# Altium PCB 1.pcbdoc
Units mil, origin at the board's own origin, x right, y up, seen from the top; angles counter-clockwise.
Board outline 44440.04 x 3139.11 mil, 2 copper layers (Top Layer, Bottom Layer); 30 components, 48 nets, 167 pads, 69 vias.
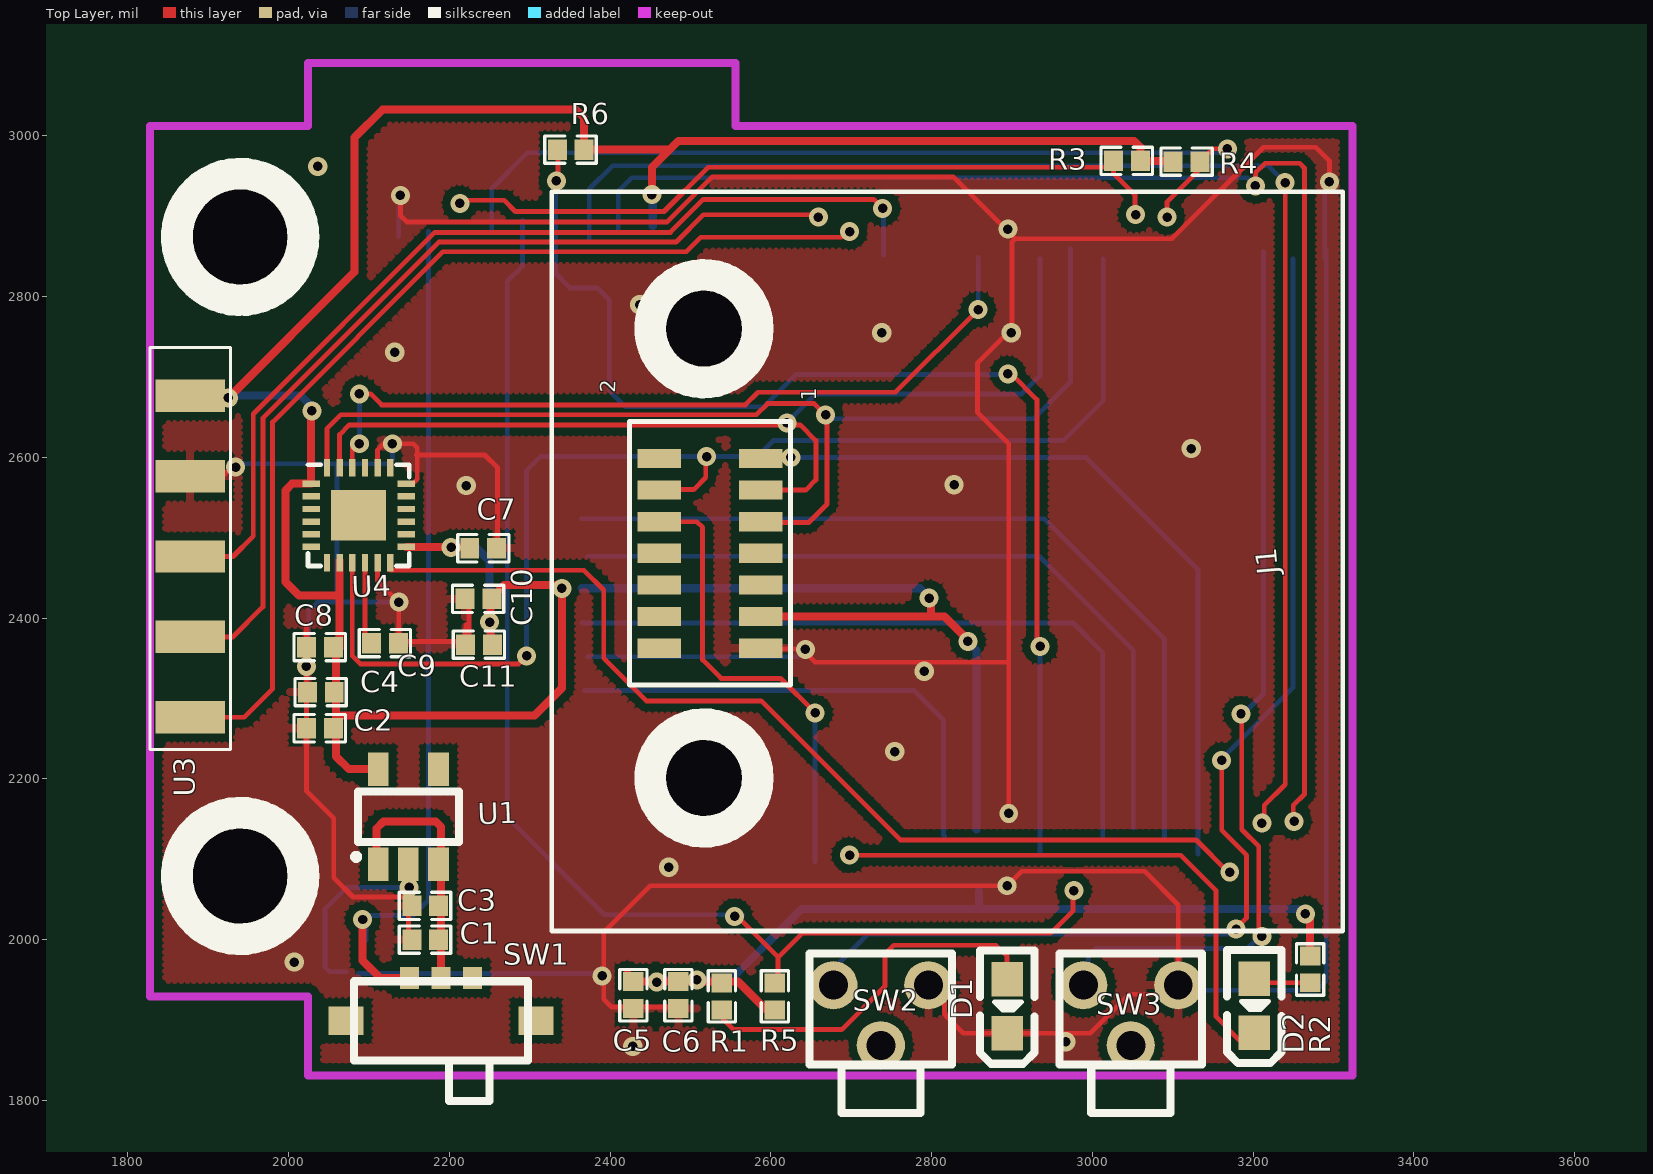
[diagram p0: Top Layer view]
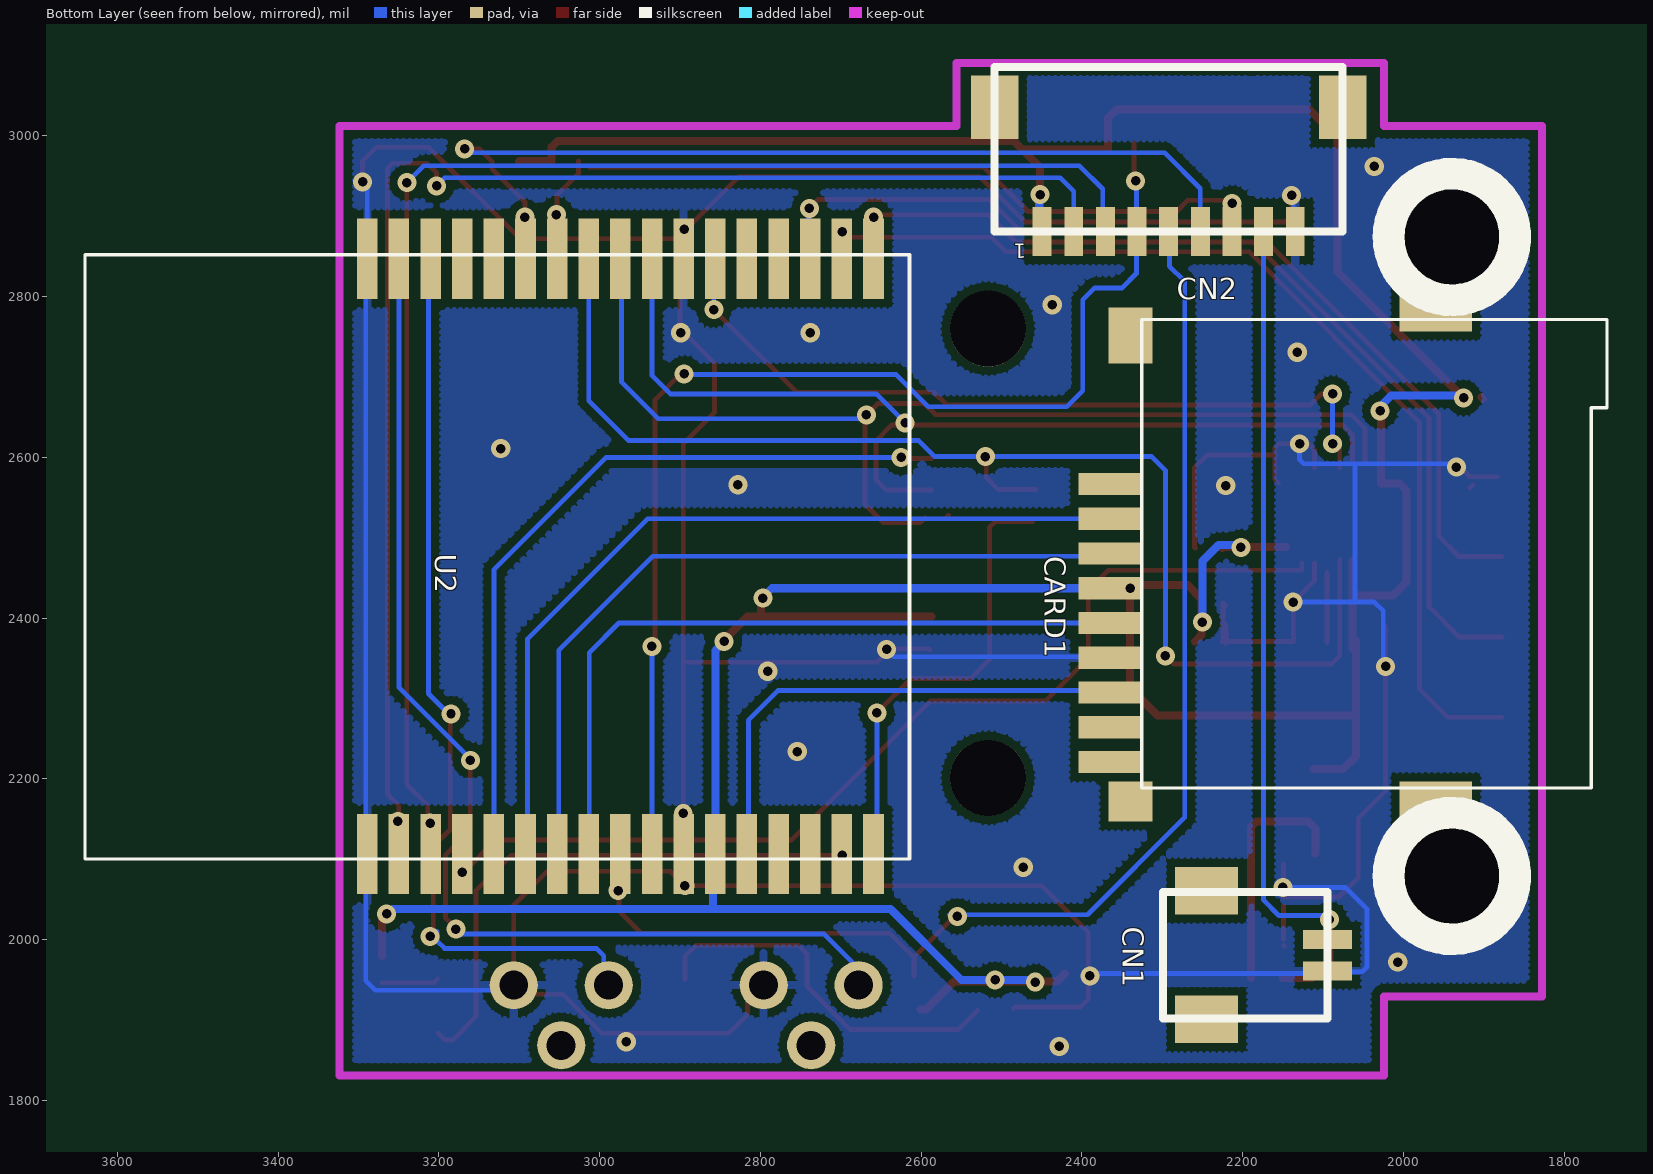
[diagram p1: Bottom Layer view, seen from below]

## Layer stack, top to bottom
Top Layer: signal copper 1.4
Dielectric: dielectric 12.6, FR-4, Dk 4.8
Bottom Layer: signal copper 1.4

## Board outline
45440.04,1000 1000,1000 1000,4139.11 45440.04,4139.11

## Design rules (kind name [scope] priority, off if disabled: settings)
Clearance Clearance_1 [(InPolygon)] p1: gap=10
Clearance [All] p2: gap=6
ComponentClearance [All] p1 off: gap=10 collisioncheckmode=3 verticalgap=10
PolygonConnect [isvia] p1: connectstyle=Direct reliefconductorwidth=10 reliefentries=4 polygonreliefangle="90 Angle"
RoutingVias [All] p1: holewidth=27.99 width=50 viastyle="Through Hole" minholewidth=11.81 minwidth=23.62 maxholewidth=27.99 maxwidth=50
SolderMaskExpansion [All] p1: expansion=4
TestPointUsage [All] p1: valid=0 allowmultiple=FALSE
Testpoint [All] p1: side=15 testpointundercomponent=TRUE minsize=40 maxsize=100 preferedsize=60 minholesize=0 maxholesize=40 preferedholesize=32 testpointgrid=1 style=1023 order=0123456789
Width Width_2 [InNet('VCC3.7')] p1: maxlimit=100 minlimit=10 preferedwidth=10 minimp=50.000000 maximp=50.000000 favimp=50.000000
Width Width_1 [InNet('VCC3.3')] p2: maxlimit=100 minlimit=10 preferedwidth=10 minimp=50.000000 maximp=50.000000 favimp=50.000000
Width [All] p3: maxlimit=10 minlimit=6 preferedwidth=10 minimp=50.000000 maximp=50.000000 favimp=50.000000
18 further rules are at their usual default settings.

## Components (designator, comment, footprint, x,y, rotation, side; value= is the part's Value field where it differs from the comment)
C1 "10uF" 0402 2170,2000 r0 top
C2 "10uF" 0402 2039,2263 r0 top
C3 "100nF" 0402 2170,2042 r0 top
C4 "100nF" 0402 2040,2308 r0 top
C5 "10uF" 0402 2429,1931 r90 top
C6 "100nF" 0402 2485,1931 r90 top
C7 "10nF" 0402 2242,2487 r180 top
C8 "100nF" 0402 2039,2364 r0 top
C9 "100nF" 0402 2120,2369 r0 top
C10 "10uF" 0402 2236,2424 r0 top
C11 "1uF" 0402 2237,2367 r0 top
CARD1 "HYC77-TF09-200" TF-015 2162.05,2476.72 r270 bottom locked
CN1 "A1002WV-S-2P" A1002WR-S-2P_LEO 2169.92,1980.66 r90 bottom
CN2 "A1002WR-S-9P" A1002WR-S-9P_LEO 2291.97,2957.04 r180 bottom locked
D1 "RED" LED-0603 2894,1917 r90 top
D2 "GREEN" LED-0603 3201.42,1917.67 r90 top
J1 "CLM-107-02-XX-D" *CLM-107-02-XX-D_2 2524.25,2480.66 r270 top locked
R1 "1K" 0402 2539,1929 r270 top
R2 "200" 0402 3271,1963 r90 top
R3 "10K" 0402 3043,2969 r0 top
R4 "10K" 0402 3117,2968 r180 top
R5 "10K" 0402 2605,1929 r270 top
R6 "10K" 0402 2351,2983 r0 top
SW1 "SSAJ120100" SW-SMD-5.5X2.5 2189.61,1925.54 r0 top
SW2 "KAN4562-0501C" KAN4562-0501C 2736.85,1905.86 r0 top
SW3 "KAN4562-0501C" KAN4562-0501C 3047.87,1905.86 r0 top
U1 "SPX3819M5-L-3-3/TR" SOT-23-5 2149,2153 r90 top
U2 "DWM1001" DWM1001 3126.61,2476.72 r270 bottom locked
U3 "GPS_Header" GPS_HEADER_SMT_NEW 1827.4,1960.97 r90 top locked
U4 "MPU-9250" QFN-24-1EP_3X3MM_PITCH0.4MM 2087,2528 r0 top

## Footprints (in the part's own frame and the unit in brackets; to place one, negate y for a bottom-side part, rotate by r counter-clockwise, add the part's x,y. Pads: shape width x height; smd on the part's side, far side on the other; paste and mask are expansions set on the pad)
0402 [mm]
  rect 0.6x0.65 smd: 1(-0.424,0) 2(0.424,0)
  silkscreen extent -0.82,-0.43 0.81,0.43
*CLM-107-02-XX-D_2 [mil]
  rect 24x54 smd: 1(-118.11,63) 2(-118.11,-63) 3(-78.74,63) 4(-78.74,-63) 5(-39.37,63) 6(-39.37,-63) 7(0,63) 8(0,-63) 9(39.37,63) 10(39.37,-63) 11(78.74,63) 12(78.74,-63) 13(118.11,63) 14(118.11,-63)
  round 94.49 hole 94.49 unplated: ""(-279.53,-7.48) ""(279.53,-7.48)
  silkscreen extent -450,-197 470,787
A1002WR-S-2P_LEO [mm]
  rect 0.6x1.55 smd: 1(-0.501,-1.924) 2(0.499,-1.924)
  rect 1.5x2 smd: 3(-2.032,1.905) 4(2.032,1.905)
  silkscreen extent -2,-1.92 2,3.27
A1002WR-S-9P_LEO [mm]
  rect 0.6x1.55 smd: 1(-4,-1.923) 2(-3,-1.923) 3(-1.997,-1.926) 4(-1,-1.923) 5(0,-1.923) 6(1,-1.923) 7(1.999,-1.923) 8(3,-1.923) 9(4,-1.923)
  rect 1.5x2 smd: 10(-5.499,1.999) 11(5.5,1.999)
  silkscreen extent -5.5,-1.92 5.5,3.28
DWM1001 [mm]
  rect 2.54x0.65 smd: 1(9.404,-4.129) 2(9.404,-3.129) 3(9.404,-2.129) 4(9.404,-1.129) 5(9.404,-0.129) 6(9.404,0.871) 7(9.404,1.871) 8(9.404,2.871) 9(9.404,3.871) 10(9.404,4.871) 11(9.404,5.871) 12(9.404,6.871) 13(9.404,7.871) 14(9.404,8.871) 15(9.404,9.871) 16(9.404,10.871) 17(9.404,11.871) 18(-9.406,11.871) 19(-9.406,10.871) 20(-9.406,9.871) 21(-9.406,8.871) 22(-9.406,7.871) 23(-9.406,6.871) 24(-9.406,5.871) 25(-9.406,4.871) 26(-9.406,3.871) 27(-9.406,2.871) 28(-9.406,1.871) 29(-9.406,0.871) 30(-9.406,-0.129) 31(-9.406,-1.129) 32(-9.406,-2.129) 33(-9.406,-3.129) 34(-9.406,-4.129)
  silkscreen extent -9.54,-13.05 9.56,13.02
GPS_HEADER_SMT_NEW [mm]
  rect 1.02x2.2 smd: 1(18.18,-1.27) 2(15.64,-1.27) 3(13.1,-1.27) 4(10.56,-1.27) 5(8.02,-1.27)
  round 3 hole 3 unplated: ""(3,-2.85) ""(23.2,-2.85)
  silkscreen extent 1,-4.85 25.2,0
KAN4562-0501C [mil]
  round 60 hole 36: 0(0,-37.39) 1(-59.05,37.4) 2(59.06,37.4)
  silkscreen extent -89,-122 89,77
LED-0603 [mil]
  rect 43x39 smd: 1(33.5,0) 2(-33.5,0)
  silkscreen extent -72,-34 70,34
QFN-24-1EP_3X3MM_PITCH0.4MM [mm]
  rect 0.55x0.2 smd: 1(-1.5,1) 2(-1.5,0.6) 3(-1.5,0.2) 4(-1.5,-0.2) 5(-1.5,-0.6) 6(-1.5,-1) 13(1.5,-1) 14(1.5,-0.6) 15(1.5,-0.2) 16(1.5,0.2) 17(1.5,0.6) 18(1.5,1)
  rect 0.2x0.55 smd: 7(-1,-1.5) 8(-0.6,-1.5) 9(-0.2,-1.5) 10(0.2,-1.5) 11(0.6,-1.5) 12(1,-1.5) 19(1,1.5) 20(0.6,1.5) 21(0.2,1.5) 22(-0.2,1.5) 23(-0.6,1.5) 24(-1,1.5)
  rect 0.875x0.8 smd: 25(-0.435,-0.4) 25(-0.435,0.4) 25(0.435,-0.4) 25(0.435,0.4)
  silkscreen extent -1.6,-1.6 1.6,1.6
SOT-23-5 [mm]
  rect 1.06x0.65 smd: 1(-1.5,0.95) 2(-1.5,0) 3(-1.5,-0.95) 4(1.5,-0.95) 5(1.5,0.95)
  silkscreen extent -1.33,-1.6 0.8,1.71
SW-SMD-5.5X2.5 [mm]
  rect 0.6x0.7 smd: 1(-1,0.675) 2(1,0.675) C(0,0.675)
  rect 1.1x0.9 smd: 4(-3,-0.675) 5(3,-0.675)
  silkscreen extent -2.75,-3.22 2.75,0.57
TF-015 [mm]
  rect 0.7x2 smd: 1(-2.292,-5.145) 2(-1.192,-5.143) 3(-0.095,-5.145) 4(1.004,-5.145) 5(2.103,-5.145) 6(3.201,-5.145) 7(4.297,-5.145) 8(5.396,-5.145) 9(6.499,-5.145)
  rect 1.27x1.397 smd: 10(7.747,-4.507)
  rect 1.27x2.286 smd: 11(7.747,5.145) 12(-7.747,5.145)
  rect 1.778x1.397 smd: 13(-6.985,-4.507)
  silkscreen extent -7.49,-4.15 7.32,10.56

## Via types
v1: diameter 23.62, hole 11.81, Top Layer to Bottom Layer, tented both sides, 55 vias
v2: diameter 24, hole 11.81, Top Layer to Bottom Layer, tented both sides, 14 vias

## Nets (pads, with @x,y where several pads share a name; then routed paths per layer and width w, separated by ;. In a path a pad name is that pad's centre, name@x,y a point inside that pad or via, vN(x,y) a via of type N, cw(c..) or ccw(c..) an arc to the next point about the centre after c; other vN are vias at no path point)
BUTTON_RST: SW2.1 U2.33 | length 1431.7
  Top Layer w6: v1@3161,2225 3161,2136 3192,2105 3192,2027 3186.65,2021.65 v1@3175.65,2021.65
  Bottom Layer w6: SW2.1 2677.8,1963.8 2721,2007 3173,2007 v1(3179,2013) ; v1@3160,2224 3249.79,2313.79 U2.33
  other v1: 3161,2223
BUTTON_SDCARD: SW3.1 U2.32 | length 1142
  Top Layer w6: v1(3185,2281) 3186,2280 3186,2137 3207,2116 v1@3207,2004
  Bottom Layer w6: SW3.1@2995,1938 2995,1980 3004,1989 3193,1989 3202,1998 v1@3202,2010 ; v1@3186.5,2279.5 3213,2306 U2.32@3213,2856
  other v1: 3211,2004
CHARGE_VC: CN1.2 CN2.8 SW1.1 | length 1068.5
  Top Layer w10: v1@2093,2025 2092,2024 2092,1974 2113.89,1952.11 SW1.1
  Bottom Layer w6: v1(2092,2025) 2097,2030 2155,2030 2173.87,2048.87 CN2.8
  Bottom Layer w10: v1(2092,2025) 2094.16,2022.84 CN1.2
D2_1: D2.1 R2.1 | length 71.6
  Top Layer w6: D2.1 3206.29,1946.3 R2.1
FOOT_2: CN2.4 R6.1 U2.10 | length 1493.8
  Top Layer w6: v1(2333,2944) 2335,2946 R6.1@2335,2991 ; v1(2895,2704) 2899,2704 2931,2672 2931,2369 v1(2935,2365)
  Bottom Layer w6: v1@2332,2943 2332,2829 2350,2811 2384,2811 2399,2796 2399,2683 2419,2663 2591,2663 2631,2703 v1@2895,2703 ; U2.10 v1@2934.83,2366
FOOT_5: CN2.5 R5.1 U2.9 | length 1610.1
  Top Layer w6: v1@2555,2032 2609,1978 ; R5.1@2609,1954.7 2609,1978 ; v1(2977,2061) 2976,2060 2976,2036 2948,2008 2639,2008 2609,1978
  Bottom Layer w6: CN2.5@2291,2895 2291,2838 2272,2819 2272,2152 2393,2031 v1@2565,2031
  other v1: 2555,2029
FOOT_6: CN2.6 R4.1 U2.29 | length 1108.3
  Top Layer w6: v1@3092,2898 v1(3093,2899) 3093,2918 3133.7,2958.7 R4.1 3149.7,2984 v1(3168,2984)
  Bottom Layer w6: CN2.6 2252.59,2934.59 2297,2979 v1@3161,2979
FOOT_7: CN2.7 R3.1 U2.28 | length 908.1
  Top Layer w6: v1@2212,2920 2268,2920 2282,2906 2467,2906 2522,2961 3013,2961 ; R3.1 3026.3,2953.7 3053,2927 3053,2903 v1@3052,2902
  other v1: 3054,2902 2213,2916
GND: C1.1 C2.1 C3.1 C4.1 C5.1 C6.1 C7.1 C8.1 C9.2 C10.1 C11.1 CARD1.6 CN1.1 CN2.9 D1.2 J1.13 SW2.2 SW3.2 U1.2 U2.1 U2.11 U2.24 U2.34 U3.2 U4.11 U4.18 U4.20 | length 7612.2
  Top Layer w6: U3.2@1883,2576 1917,2576 v1@1932,2591 ; U3.2@1913,2566 U3.2@1917,2562 ; 2022.3,2390 2022.3,2184.7 2056,2151 2056,2077 2080,2053 2148,2053 2149,2052 U1.2 ; U4.11 2110.62,2446.38 v1(2137,2420) 2137,2391.7 2136.7,2371 2219,2371 2221,2392 C11.1@2221,2368.11 ; U4.20 2110.62,2609.62 2118,2617 2155,2617 2160,2612 2160,2573 U4.18@2155,2568 ; v1(2139,2926) 2139,2901 2147,2893 2471,2893 2527,2949 2827,2949 2904,2872 ; C1.1@2148,1992 C1.1@2149,1993 ; C1.1@2149,2000 C3.1@2149,2042 ; 2159,2603 2244,2603 2260,2587 2260,2488.3 C7.1 ; C10.1@2221,2415.89 2224.32,2419.21 2224.32,2372.28 C11.1@2225.6,2371 ; C6.1 2483.3,1916 2402,1916 2392,1926 2392,2009 2450,2067 v1(2894,2067) 2912,2085 3065,2085 3106.93,2043.07 SW3.2 ; J1.13@2589,2361 2590,2362 2638,2362 2655,2345 2895,2345 ; SW2.2@2816,1938 2816,1907 2839.5,1883.5 2997.5,1883.5 3046,1932 3109,1932 SW3.2@3113,1928 ; v1(2896,2157) 2896,2617 2857,2656 2857,2717 2900,2760 2900,2868 2904,2872 ; v1@3295,2937 3295,2969 3278,2986 3213,2986 3099,2872 2904,2872
  Bottom Layer w6: v1@1932,2589 1935,2592 2124,2592 2129,2597 v1(2129,2617) ; v1@2025,2344 2025,2409 2036,2420 v1(2137,2420) ; 2059,2420 2060,2421 2060,2592 ; CN1.1@2072,1960 2051,1960 2045,1966 2045,2038 2072,2065 v1(2150,2065) ; CN1.1@2086,1958 2388,1958 v1@2391,1955 ; CN2.9@2137,2875 2137,2924 v1(2139,2926) ; CARD1.6@2372,2352 2634,2352 v1(2643,2361) ; SW3.2 3113.19,1937 3279,1937 3291,1949 U2.34@3291,2858 ; U2.34 3289.16,2940.16 v1@3291,2942
  other v1: 2390,1955 2022,2340 1934,2588 2895,2884 3295,2943
  other v2: 2428,1867 2967,1873 2007,1972 2473,2090 2754,2234 2791,2334 2221,2565 2828,2566 3123,2611 2132,2731 2738,2755 2899,2755 2437,2790 2036,2962
GPS_1PPS: U2.19 U3.5 | length 1262.4
  Top Layer w6: U3.5 1944.72,2276.72 1980,2312 1980,2644 2191.96,2855.96 2494.96,2855.96 2513,2874 2688,2874 v1@2695,2881
  other v1: 2698,2881
GPS_UART_RX: U2.18 U3.4 | length 1134.8
  Top Layer w6: U3.4 1930.72,2376.72 1968,2414 1968,2649 2186.98,2867.98 2481.98,2867.98 2516,2902 v1@2657,2902
  other v1: 2659,2899
GPS_UART_TX: U2.20 U3.3 | length 1197.6
  Top Layer w6: U3.3 1930.72,2476.72 1956,2502 1956,2654 2182,2880 2475,2880 2516,2921 2728,2921 v1(2739,2910)
  Bottom Layer w6: v1(2739,2910) 2740,2909 U2.20@2740,2852
INT_IMUA: U2.4 U4.12 | length 1258.7
  Top Layer w6: U4.12 2126.38,2459.62 2367.38,2459.62 2392,2435 2392,2350 2445,2297 2588,2297 2761,2124 3129,2124 v1@3170,2083
  other v1: 3171,2084
INT_IMUB: J1.1 U2.5 | length 956.6
  Top Layer w6: J1.1 2623.77,2598.77 v1(2625,2600)
  Bottom Layer w6: v1(2625,2600) 2992,2600 3131.68,2460.32 U2.5
LED_R: D2.2 U2.16 | length 694.5
  Top Layer w6: v1(2698,2105) 3110,2105 3154,2061 3154,1904 3183,1875 3192.25,1875 D2.2
R1_2: D1.1 R1.2 | length 475
  Top Layer w6: R1.2@2530,1911.7 2553.7,1888 2688,1888 2742,1942 2742,1982 2753,1993 2880,1993 2894,1979 D1.1
S$21: 
S$23: 
S$33: 
S$35: 
S$39: 
S$41: 
S$52: 
S$54: 
S$1289: 
S$1291: 
S$1294: 
S$1296: 
S$1299: 
S$1301: 
S$1303: 
S$1306: 
S$1308: 
S$1310: 
SDCARD_CLK: CARD1.5 U2.8 | length 893.7
  Bottom Layer w6: CARD1.5 2976.06,2393.94 3013,2357 U2.8@3013,2127
SDCARD_MISO: CARD1.7 U2.13 | length 606.7
  Bottom Layer w6: CARD1.7@2368,2310 2778,2310 2815,2273 2815,2130 U2.13@2816,2129
SDCARD_MOSI: CARD1.3 U2.7 | length 948.5
  Bottom Layer w6: CARD1.3@2372,2477 2934,2477 3051,2360 U2.7@3051,2139
SDCARD_NCS: CARD1.2 U2.6 | length 1035.4
  Bottom Layer w6: CARD1.2 2940.29,2523.65 3090,2373.94 U2.6@3090,2126
SPI_CLK: J1.3 U2.25 U4.23 | length 1248.3
  Top Layer w6: U4.23@2063.38,2593.05 2063.38,2628.38 2075.38,2640.38 2636.62,2640.38 2656,2621 2656,2572 2643.4,2559.4 J1.3
  Bottom Layer w6: v1(2620,2643) 2656,2679 2912,2679 2934.83,2701.83 U2.25
SPI_MISO: J1.4 U2.27 U4.9 | length 1600.8
  Top Layer w6: U4.9@2079,2473 2079,2353 2089,2343 2286,2343 v1(2296,2353) ; J1.4@2457,2560 2504,2560 2519,2575 2519,2600 v1(2520,2601)
  Bottom Layer w6: v1(2296,2353) 2296,2584 2313,2601 2583,2601 2603,2621 2964,2621 3013.57,2670.57 U2.27
SPI_MOSI: J1.5 U2.26 U4.24 | length 1386.6
  Top Layer w6: U4.24@2047.63,2593.05 2047.63,2635.64 2065,2653 2582,2653 2596,2667 2654,2667 v1(2668,2653) ; J1.5@2566,2528 J1.5@2569,2525 ; J1.5@2595,2525 2601,2519 2647,2519 2670,2542 2670,2645 v1@2659,2656
  Bottom Layer w6: v1@2663,2648 2927,2648 2973,2694 U2.26@2973,2860
SPI_NCS_IMUA: U2.23 U4.22 | length 989.1
  Top Layer w6: v1@2079,2613 2079.12,2612.88 U4.22 ; v1@2085,2679 2102,2679 2115.62,2665.38 2568.38,2665.38 2584,2681 2755,2681 v1(2858,2784)
  Bottom Layer w6: v1@2085,2679 2088,2676 v1(2088,2617) ; v1@2853,2779 v1(2858,2784) U2.23@2858,2849
  other v1: 2088,2679
SPI_NCS_IMUB: J1.6 U2.17 | length 574
  Top Layer w6: J1.6 2507.97,2520.03 2515,2513 2515,2348 2538,2325 2612,2325 v1(2655,2282)
  Bottom Layer w6: U2.17@2655,2097 v1(2655,2282)
SWD_CLK: CN2.2 U2.2 | length 1758.1
  Top Layer w6: v1(3203,2938) 3203,2954 3215,2966 3258,2966 3264,2960 3264,2181 3250,2167 v1@3250,2146
  Bottom Layer w6: CN2.2 2410.09,2931.09 2427,2948 3193,2948 v1(3203,2938)
  other v1: 3251,2147
SWD_DIO: CN2.3 U2.3 | length 1752.5
  Top Layer w6: v1@3214,2150 3214,2167 3240,2193 v1(3240,2942)
  Bottom Layer w6: CN2.3@2374,2871 2374,2934 2403,2963 3219,2963 v1(3240,2942)
  other v1: 3211,2145
U4_10: C9.1 U4.10 | length 87.4
  Top Layer w6: C9.1@2094.88,2369.57 2094.88,2456.94
VCC3.3: C2.2 C4.2 C5.2 C6.2 C7.2 C8.2 C10.2 C11.2 CARD1.4 CN2.1 J1.11 R1.1 R2.2 R3.2 R4.2 R5.2 R6.2 U1.5 U2.12 U3.1 U4.1 U4.8 U4.13 | length 5218.7
  Top Layer w10: U3.1@1901,2673 U3.1@1903,2675 ; v1(1925,2674) 2082,2831 2082,2998 2117,3033 2357,3033 2367.7,3022.3 R6.2 2474,2983 ; v1@2027.94,2659.05 U4.1 2004.37,2567.37 1996,2559 1996,2445 2013,2428 2061.38,2428 2063.38,2426 ; C2.2@2059,2271 2059,2228 2074.96,2212.04 U1.5 ; C8.2@2059,2372 2059,2276 2062,2279 2306,2279 2340,2313 v1(2340,2437) 2336,2441 2268,2441 2251,2424 2251,2379 C11.2@2259,2371 ; C8.2@2063,2362 U4.8@2063,2472 ; U4.13 2223.66,2488.63 C7.2 ; C5.2@2421,1958 2431,1948 2559,1948 2594,1913 R5.2@2600.7,1913 ; v1@2452,2923 2452,2961 2485,2994 3052,2994 3059.7,2986.3 R3.2 3099.3,2969 R4.2 ; J1.11 2816.08,2401.92 v1@2849,2369 ; v1(2797,2425) 2799,2423 2799,2406 ; v1(3265,2032) 3271,2026 R2.2
  Bottom Layer w10: v1(1925,2674) 1928,2677 2015,2677 2029,2663 v1(2029,2658) ; v1@2205,2488 2208,2491 2230,2491 2250,2471 v1(2250,2395) ; CARD1.4 2785.8,2437.2 v1@2800,2423 ; CN2.1@2453,2888 v1@2453,2921 ; v1(2458,1947) 2461,1950 2550,1950 2638,2038 3258,2038 3264,2032 v1(3265,2032) ; v1(2845,2371) 2856,2360 U2.12@2856,2137 ; 2859,2038 U2.12@2859,2060
  other v1: 2508,1950 2202,2488 2452,2927
VCC3.7: C1.2 C3.2 SW1.C U1.1 U1.3 | length 306.8
  Top Layer w10: U1.1@2110,2107 2109,2108 2109,2138 2118,2147 2183,2147 2189.61,2140.39 SW1.C
pads on no net: CARD1.1 CARD1.8 CARD1.9 CARD1.10 CARD1.11 CARD1.12 CARD1.13 CN1.3 CN1.4 CN2.10 CN2.11 J1. J1.2 J1.7 J1.8 J1.9 J1.10 J1.12 J1.14 SW1.2 SW1.4 SW1.5 SW2.0 SW3.0 U1.4 U2.14 U2.15 U2.21 U2.22 U2.30 U2.31 U3. U4.2 U4.3 U4.4 U4.5 U4.6 U4.7 U4.14 U4.15 U4.16 U4.17 U4.19 U4.21 U4.25

## Polygon pours and split planes (outlines as drawn)
GND on Top Layer (hatched 90Degree grid 7.87 track 7.87, remove dead copper): 1785,3115 3312,3115 3312,1829 1817,1829
GND on Bottom Layer (hatched 90Degree grid 7.87 track 7.87, remove dead copper): 3341,1802 3341,3142 1818,3142 1818,1818

## Text inside footprints (layer, text, board x,y; h text height)
CN2: Bottom Overlay "1" at 2469.15,2871.87 h31.5 r180
J1: Top Overlay "1" at 2662.76,2670.65 h32 r90; Top Overlay "2" at 2412.83,2680.07 h32 r88
U3: Document "26.2" at 1580,2370.42 h80 r90; Document "37.4" at 2590.56,1580 h80 r180